# EAGLE board opto_isolator (EAGLE 4.16)
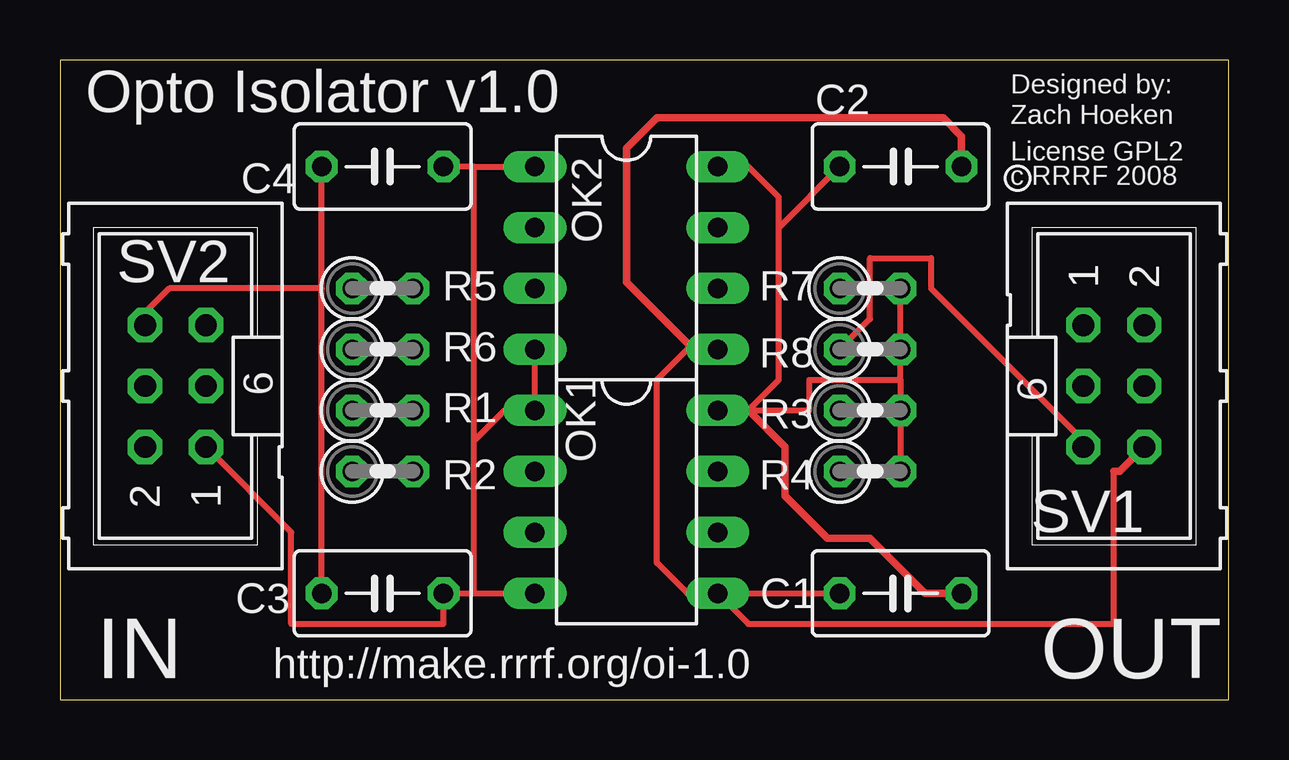
[diagram p0: board, top side]
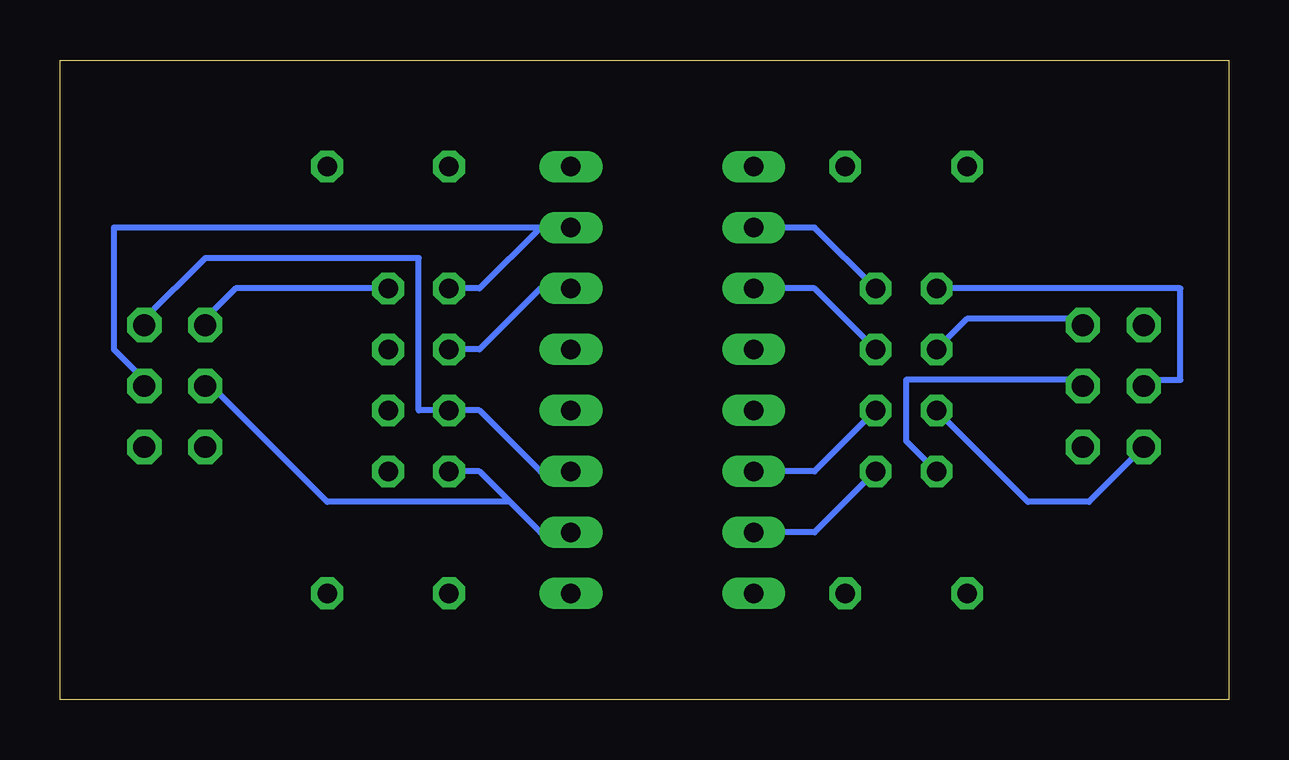
[diagram p1: board, bottom side, seen from below]

Size 48.72 x 26.66 mm. Coordinates in mm from the lower left corner, seen from the top.
Outline: 0,0 48.72,0 48.72,26.66 0,26.66 0,0
Copper layers (1*16): Top 0.035mm / dielectric 1.5mm / Bottom 0.035mm
Design rules "default": minimum track width 10mil, minimum drill 24mil, track to track 8mil, track to pad 8mil, pad to pad 8mil, via to via 8mil, smd to smd 8mil, copper to edge 40mil, drill to drill 8mil, minimum pad ring 10mil, minimum via ring 8mil, stop-mask expansion 4mil, vias tented up to drill 0mil, thermal gap 10mil

## Footprints (pad centres in the part's own frame; a part is rotated, then mirrored left to right if it is on the bottom)
C050-035X075 = drill 0.813 octagon: 1 -2.54,0; 2 2.54,0
DIL08 = drill 0.813 long: 1 -3.81,-3.81; 2 -1.27,-3.81; 3 1.27,-3.81; 4 3.81,-3.81; 5 3.81,3.81; 6 1.27,3.81; 7 -1.27,3.81; 8 -3.81,3.81
0207/2V = drill 0.813 octagon: 1 -1.27,0; 2 1.27,0
ML6 = drill 0.914 octagon: 1 -2.54,-1.27; 2 -2.54,1.27; 3 0,-1.27; 4 0,1.27; 5 2.54,-1.27; 6 2.54,1.27

## Placement (x,y rotation side)
C1  100nF  [C050-035X075]  35.04,4.44 180 top
C2  100nF  [C050-035X075]  35.04,22.22 0 top
C3  100nF  [C050-035X075]  13.45,4.44 180 top
C4  100nF  [C050-035X075]  13.45,22.22 180 top
OK1  HCPL2630  [DIL08]  23.61,8.25 270 top
OK2  HCPL2630  [DIL08]  23.61,18.41 270 top
R1  220  [0207/2V]  13.45,12.06 0 top
R2  220  [0207/2V]  13.45,9.52 0 top
R3  3.3K  [0207/2V]  33.77,12.06 0 top
R4  3.3K  [0207/2V]  33.77,9.52 0 top
R5  220  [0207/2V]  13.45,17.14 0 top
R6  220  [0207/2V]  13.45,14.6 0 top
R7  3.3K  [0207/2V]  33.77,17.14 0 top
R8  3.3K  [0207/2V]  33.77,14.6 0 top
SV1  [ML6]  43.93,13.08 270 top
SV2  [ML6]  4.81,13.08 90 top

## Library data of the parts
C1-C4 R1-R8 = rcl
OK1 OK2 = optocoupler
SV1 SV2 = con-harting-ml

## Nets
IN1: R1.1 SV2.2
IN2: R2.1 SV2.3
IN3: R5.1 SV2.4
IN4: R6.1 SV2.5
IN_GND: C3.2 C4.2 SV2.6
IN_VCC: C3.1 C4.1 OK1.1 OK1.4 OK2.1 OK2.4 SV2.1
N$1: OK2.2 R5.2
N$3: OK1.2 R1.2
N$4: OK1.3 R2.2
N$6: OK2.3 R6.2
OUT1: OK1.7 R3.1 SV1.2
OUT2: OK1.6 R4.1 SV1.3
OUT3: OK2.7 R7.1 SV1.4
OUT4: OK2.6 R8.1 SV1.5
OUT_GND: C1.2 C2.2 OK1.5 OK2.5 SV1.6
OUT_VCC: C1.1 C2.1 OK1.8 OK2.8 R3.2 R4.2 R7.2 R8.2 SV1.1

## Tracks (layer width: path | path; a pad name or v marks a point on that pad's centre or on a via)
IN1
  Bottom 0.254: R1.1 8.37,8.25 5.83,8.25 SV2.2 3.29,10.79
IN2
  Bottom 0.254: R2.1 13.45,10.79 13.45,13.33 5.83,13.33 SV2.3
IN3
  Bottom 0.254: R5.1 2.02,17.14 2.02,13.33 3.29,13.33 SV2.4
IN4
  Bottom 0.254: R6.1 10.91,15.87 5.83,15.87 SV2.5
IN_GND
  Top 0.254: 10.91,17.14 C4.2 | C3.2 10.91,17.14 | 10.91,17.14 4.56,17.14 3.29,15.87 SV2.6
IN_VCC
  Top 0.254: 17.26,22.22 C4.1 | 17.26,22.22 OK2.1 | OK2.4 OK1.1 18.53,12.06 17.26,10.79 | 17.26,4.44 C3.1 15.99,3.17 9.64,3.17 9.64,6.98 SV2.1 5.83,10.79 | 17.26,4.44 OK1.4 | 17.26,4.44 17.26,10.79 | 17.26,10.79 17.26,22.22
N$1
  Bottom 0.254: R5.2 17.26,19.68 OK2.2
N$3
  Bottom 0.254: R1.2 17.26,9.52 OK1.2
N$4
  Bottom 0.254: R2.2 17.26,6.98 OK1.3
N$6
  Bottom 0.254: R6.2 17.26,17.14 OK2.3
OUT1
  Bottom 0.254: OK1.7 28.69,9.52 31.23,12.06 R3.1 33.77,12.06 33.77,18.41 42.66,18.41 45.2,15.87 SV1.2
OUT2
  Bottom 0.254: 29.96,8.25 31.23,9.52 R4.1 | 29.96,8.25 28.69,6.98 OK1.6 | 29.96,8.25 37.58,8.25 42.66,13.33 SV1.3
OUT3
  Bottom 0.254: 28.69,19.68 31.23,17.14 R7.1 | 28.69,19.68 46.47,19.68 46.47,14.6 45.2,13.33 SV1.4 | OK2.7 28.69,19.68
OUT4
  Top 0.254: R8.1 33.77,15.87 33.77,18.41 36.31,18.41 36.31,17.14 42.66,10.79 SV1.5
  Bottom 0.254: R8.1 31.23,14.6 28.69,17.14 OK2.6
OUT_GND
  Top 0.254: OK1.5 C1.2 | OK2.5 26.4,14.6 26.15,14.6 24.88,13.33 24.88,5.71 26.15,4.44 OK1.5 | OK1.5 28.69,3.17 43.93,3.17 43.93,9.52
  Top 0.305: 43.93,9.52 44.18,9.52 SV1.6 | C2.2 37.58,23.49 36.82,24.25 24.88,24.25 23.61,22.98 23.61,17.39 26.4,14.6
OUT_VCC
  Top 0.254: 28.69,12.06 29.96,13.33 29.96,19.68 | 29.96,19.68 29.96,20.95 28.69,22.22 OK2.8 | 29.96,19.68 C2.1 | R4.2 R3.2 35.04,13.33 | R7.2 R8.2 35.04,13.33 | 28.69,12.06 31.23,12.06 31.23,13.33 35.04,13.33 | OK1.8 28.69,12.06
  Top 0.305: C1.1 36.06,4.44 33.77,6.73 31.99,6.73 30.21,8.5 30.21,10.54 28.69,12.06
  Bottom 0.254: R7.2 41.39,17.14 42.66,15.87 SV1.1

## Text on the board
tPlace: Designed by: | Opto Isolator v1.0 | Zach Hoeken | License GPL2 | c RRRF 2008 | IN | http://make.rrrf.org/oi-1.0 | OUT